# Altium PCB PCB2.PcbDoc
Units mil, origin at the board's own origin, x right, y up, seen from the top; angles counter-clockwise.
Board outline 6000 x 4000 mil, 2 copper layers (Top Layer, Bottom Layer); 16 components, 9 nets, 51 pads, 0 vias.
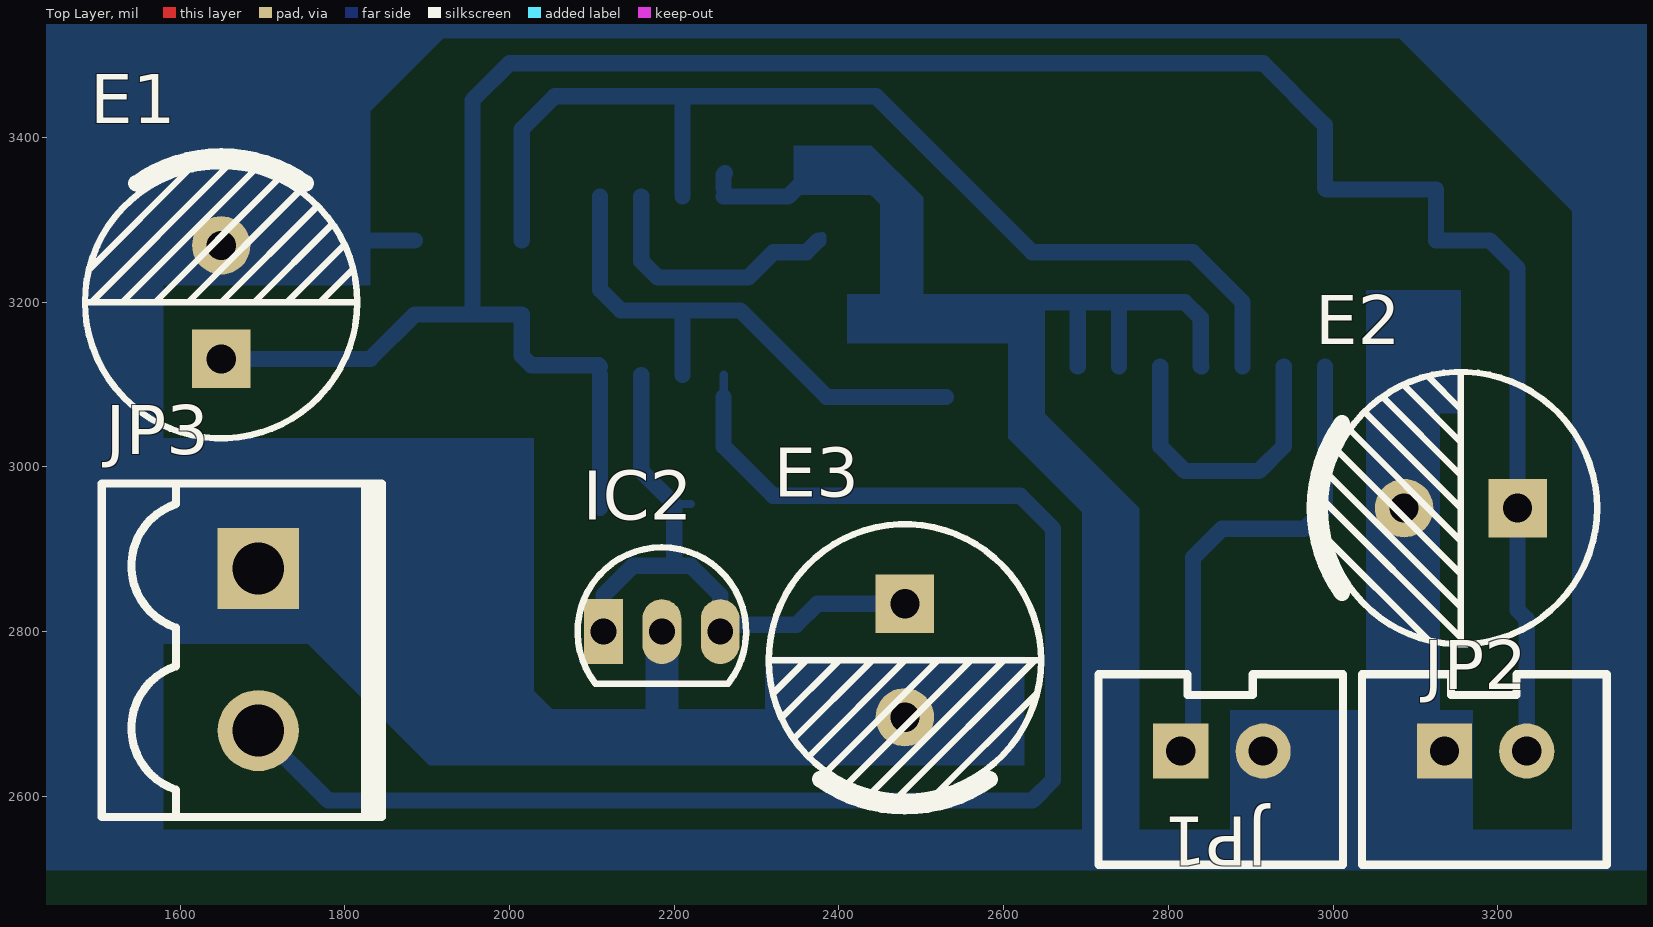
[diagram p0: Top Layer view]
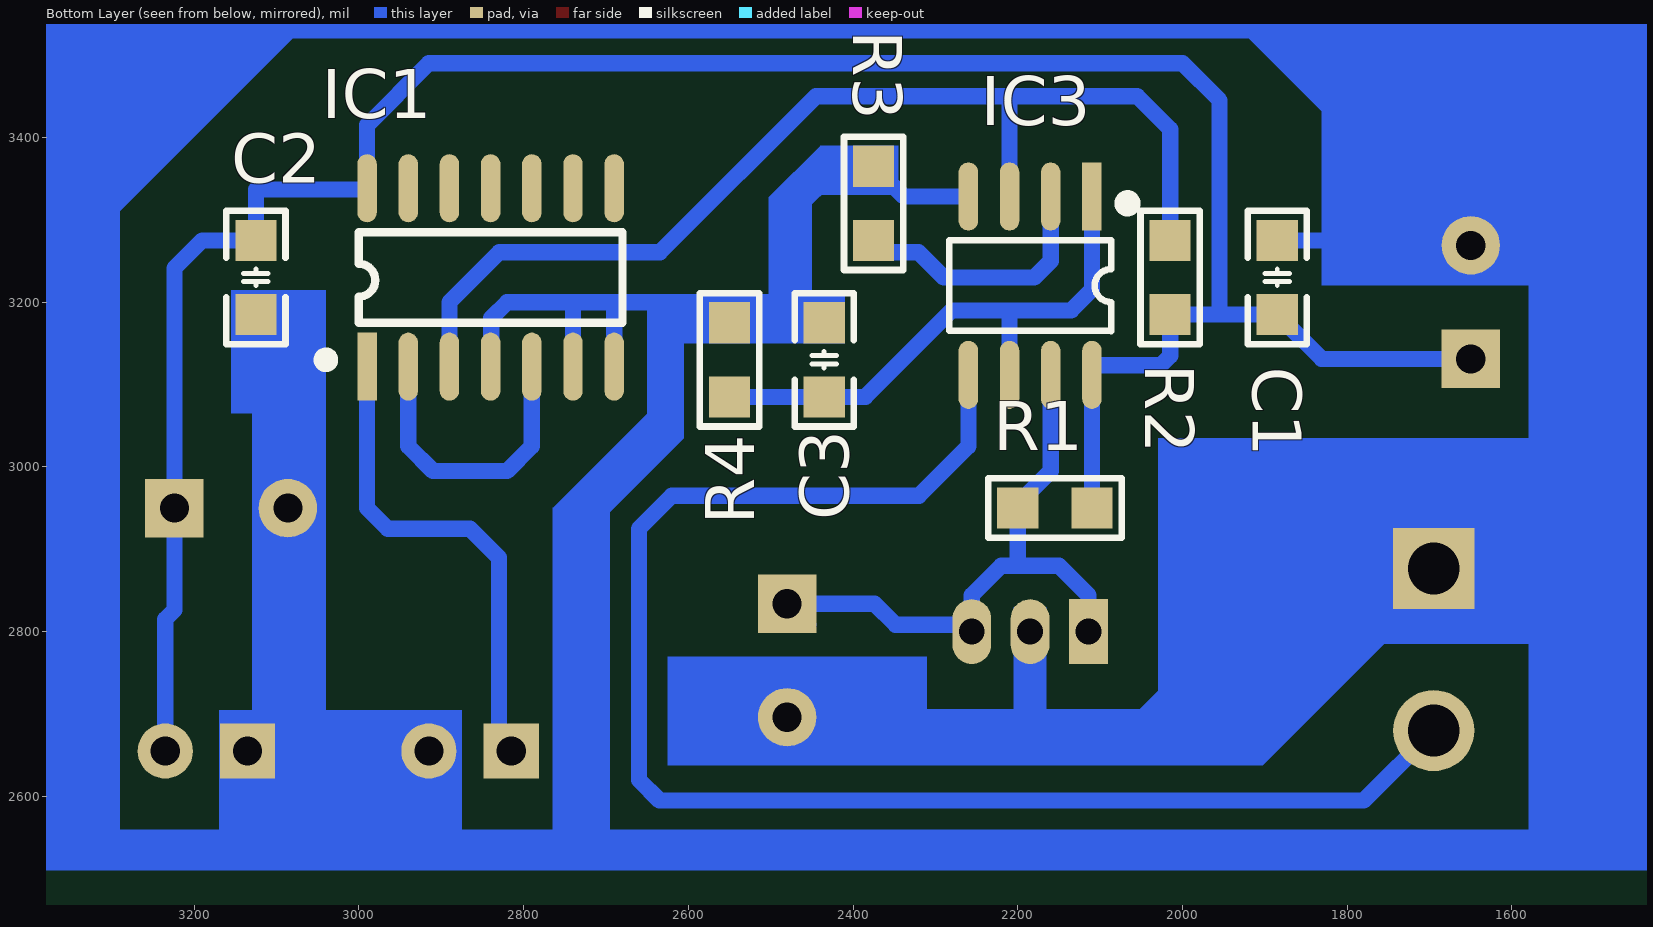
[diagram p1: Bottom Layer view, seen from below]

## Layer stack, top to bottom
Top Solder: solder mask 0.4, Solder Resist, Dk 3.5
Top Layer: signal copper 1.4
Dielectric 1: dielectric 12.6, FR-4, Dk 4.8
Bottom Layer: signal copper 1.4
Bottom Solder: solder mask 0.4, Solder Resist, Dk 3.5

## Board outline
1000,1000 7000,1000 7000,5000 1000,5000

## Design rules (kind name [scope] priority, off if disabled: settings)
Clearance [All] p1: gap=10 ignorepadtopadclearanceinfootprint=FALSE except(0: Arc-Hole Track-Hole SMDPad-Hole THPad-Hole Via-Hole Fill-Hole Poly-Hole Region-Hole Text-Hole)
PolygonConnect [All] p1: connectstyle=Relief reliefconductorwidth=10 reliefentries=4 polygonreliefangle="90 Angle" airgapwidth=10
RoutingVias [All] p1: holewidth=28 width=50 viastyle="Through Hole" minholewidth=28 minwidth=50 maxholewidth=28 maxwidth=50
SolderMaskExpansion [All] p1: expansion=4
Width [All] p1: maxlimit=39.37 minlimit=10 preferedwidth=31.5 toplayer_maxwidth=10 toplayer_prefwidth=10 bottomlayer_minwidth=19.68 minimp=50.000000 maximp=50.000000 favimp=50.000000
30 further rules are at their usual default settings.

## Components (designator, comment, footprint, x,y, rotation, side; value= is the part's Value field where it differs from the comment)
C1 "104" "C 0805_M" 1885,3230 r270 bottom
C2 "104" "C 0805_M" 3125,3230 r90 bottom
C3 "1n" "C 0805_M" 2435,3130 r270 bottom
E1 "220uF" "CAP 3.5*8*11.5" 1650,3200 r90 top
E2 "220uF" "CAP 3.5*8*11.5" 3155,2950 r180 top
E3 "100uF" "CAP 3.5*8*11.5" 2480,2765 r270 top
IC1 "CD4013" SOP14_M 2840,3230 r90 bottom
IC2 "TL431" TO92A 2185,2800 r270 top
IC3 "LM331" SOP8_M 2185,3220 r270 bottom
JP1 "HDR-1X2" XH2.54-LI-2P 2865,2655 r0 top
JP2 "HDR-1X2" XH2.54-LI-2P 3185,2655 r0 top
JP3 "HDR-1X2" KF2EDGK5.0-LI-2P 1695,2778.31 r270 top
R1 "4.7K" "R 0805_M" 2155,2950 r180 bottom
R2 "4.7K" "R 0805_M" 2015,3230 r270 bottom
R3 "4.7K" "R 0805_M" 2375,3320 r270 bottom
R4 "10K" "R 0805_M" 2550,3130 r270 bottom

## Footprints (in the part's own frame and the unit in brackets; to place one, negate y for a bottom-side part, rotate by r counter-clockwise, add the part's x,y. Pads: shape width x height; smd on the part's side, far side on the other; paste and mask are expansions set on the pad)
"C 0805_M" [mil] "无极性贴片电容"
  rect 50x50 smd: 1(-45,0) 2(45,0)
  silkscreen extent -81,-36 81,36, body extent -39,-24 39,24, height 20
"CAP 3.5*8*11.5" [mm] "脚距3.5mm直径8mm高度11.5mm"
  rect 1.8x1.8 hole 0.9: 1(-1.75,0)
  round 1.8 hole 0.9: 2(1.75,0)
  silkscreen extent -4.2,-4.2 4.5,4.2, body extent -4,-4 4.01,4, height 11.53
KF2EDGK5.0-LI-2P [mm] "立插端子"
  rect 2.5x2.5 hole 1.6: 1(-2.5,0)
  round 2.5 hole 1.6: 2(2.5,0)
  silkscreen extent -5.12,-4.83 5.17,3.81, body extent -5.04,-4.75 5.04,3.75, height 11.25
"R 0805_M" [mil] "1/8W贴片电阻"
  rect 50x50 smd: 1(-45,0) 2(45,0)
  silkscreen extent -81,-36 81,36, body extent -39,-25 39,25, height 20
SOP8_M [mm] "5*6*1.8mm（长宽高）"
  rect 2.1x0.6 smd: 1(-2.75,1.905)
  oval 2.1x0.6 smd: 2(-2.75,0.635) 3(-2.75,-0.635) 4(-2.75,-1.905) 5(2.75,-1.905) 6(2.75,-0.635) 7(2.75,0.635) 8(2.75,1.905)
  silkscreen extent -2.69,-2.5 1.4,3.15, body extent -3,-2.5 3,2.5, height 1.9
SOP14_M [mm] "8.7*6.2*1.8mm（长宽高）"
  rect 2.1x0.6 smd: 1(-2.75,3.81)
  oval 2.1x0.6 smd: 2(-2.75,2.54) 3(-2.75,1.27) 4(-2.75,0) 5(-2.75,-1.27) 6(-2.75,-2.54) 7(-2.75,-3.81) 8(2.75,-3.81) 9(2.75,-2.54) 10(2.75,-1.27) 11(2.75,0) 12(2.75,1.27) 13(2.75,2.54) 14(2.75,3.81)
  silkscreen extent -2.67,-4.06 1.4,5.21, body extent -3,-4.35 3,4.35, height 1.9
TO92A [mm] "92晶体管"
  rect 2x1.2 hole 0.8: 1(0,-1.8)
  oval 2x1.2 hole 0.8: 2(0,0) 3(0,1.8)
  silkscreen extent -2.6,-2.6 1.6,2.6, body extent -2.3,-2.3 1.3,2.3, height 7.6
XH2.54-LI-2P [mm] "接插件，2P"
  rect 1.7x1.7 hole 0.9: 1(-1.27,0)
  round 1.7 hole 0.9: 2(1.27,0)
  silkscreen extent -3.81,-3.51 3.74,2.37, body extent -3.77,-3.3 3.77,2.4, height 7.05

## Part data
C1 C2 C3: library part C, "无极性贴片电容"
E1 E2 E3: library part C-CAP, "直插电解电容"
IC2: library part TL431-ID, "可调基准稳压芯片", BOM名称=¿Éµ÷»ù×, 学习资源=www.ooocke.
IC3: "频率电压转换器"
JP1 JP2 JP3: library part "Header 2", "2P接插件", BOM名称=2P接, 学习资源=www.ooocke.
R1 R2 R3 R4: library part R, "贴片电阻"

## Nets (pads, with @x,y where several pads share a name; then routed paths per layer and width w, separated by ;. In a path a pad name is that pad's centre, name@x,y a point inside that pad or via, vN(x,y) a via of type N, cw(c..) or ccw(c..) an arc to the next point about the centre after c; other vN are vias at no path point)
cin: E3.1 IC2.1 IC2.3 IC3.7 R1.1 | length 802.4
  Bottom Layer w10: R1.1@2200,2955 R1.1@2220,2955
  Bottom Layer w19.68: IC2.1 2114.13,2844.13 2150,2880 2200,2880 ; IC3.7 2160,2995 2200,2955 R1.1 2200,2880 ; E3.1@2454.41,2808.31 E3.1 2373.9,2833.9 2348.31,2808.31 2264.17,2808.31 IC2.3 2255.87,2844.13 2220,2880 2200,2880
F_O: IC1.3 IC3.3 R2.1 | length 1330.1
  Bottom Layer w19.68: R2.1 2015,3410 2055,3450 2210,3450 ; IC3.3 2210,3450 ; IC1.3 2890,3200 2829.53,3260.47 2634.53,3260.47 2445,3450 2210,3450
GND: C1.1 C2.1 C3.1 E1.2 E2.2 E3.2 IC1.4 IC1.6 IC1.7 IC2.2 IC3.4 JP1.2 JP2.1 JP3.1 R3.1 R4.1 | length 3867.5
  Bottom Layer w10: IC3.4 IC3.4@2260,3338.71 ; R3.1@2370.74,3360.74 R3.1 ; 2839.25,3180.75 2840,3180 IC1.4
  Bottom Layer w19.68: 1540,3275 C1.1 ; JP3.1 1867.4,2876.73 2048.03,2696.1 2185,2696.1 ; IC2.2 2185,2696.1 ; IC3.4 2338.27,3328.27 R3.1@2370.74,3360.74 ; IC3.4@2260,3338.71 2260,3354.66 IC3.4@2261.82,3356.48 ; R3.1 2386.53,3353.47 2436.53,3353.47 2490,3300 2490,3190.16 ; C3.1 2450.16,3190.16 2490,3190.16 ; E3.2 2185,2696.1 ; IC1.7 2690,3200 ; 2725,2530 2725,2970 2625.16,3069.84 2625.16,3190.16 ; IC1.6 2740,3200 ; IC1.4 2839.25,3122.49 2839.25,3180.75 2820,3200 2740,3200 ; JP1.2@2930,2655 3110,2655 3086.38,2678.62 3086.38,2949.72 E2.2 3086.1,3061.1 3125,3100 C2.1 ; 2490,3190.16 2534.84,3190.16 R4.1 2565.16,3190.16 2625.16,3190.16 ; 2625.16,3190.16 2635,3200 2690,3200 ; 2690,3200 2740,3200
NetC3_2: C3.2 IC3.1 IC3.6 R4.2 | length 667.5
  Bottom Layer w19.68: IC3.1 2110,3215 2135,3190 2215,3190 ; IC3.6 2210,3185 2215,3190 ; R4.2@2530,3085 C3.2 2385,3085 2280,3190 2215,3190
NetIC1_1: IC1.1 JP1.1 | length 596.9
  Bottom Layer w19.68: JP1.1@2805,2660 2815,2670 2830,2685 2830,2890 2865,2925 2965,2925 2990,2950 IC1.1
NetIC1_2: IC1.2 IC1.5 | length 368.3
  Bottom Layer w19.68: IC1.5 2790,3025 2820,2995 2910,2995 2940,3025 IC1.2
NetIC3_2: IC3.2 R3.2 | length 327.3
  Bottom Layer w10: R3.2 R3.2@2380,3280
  Bottom Layer w19.68: IC3.2 2160,3250 2180,3230 2290,3230 2320.47,3260.47 2360.47,3260.47 R3.2
Ser_IN: IC3.5 JP3.2 | length 1843.7
  Bottom Layer w10: IC3.5@2260,3085 IC3.5
  Bottom Layer w19.68: JP3.2 1779.88,2595 2635,2595 2660,2620 2660,2925 2620,2965 2320,2965 2260,3025 IC3.5@2260,3085
VCC: C1.2 C2.2 E1.1 E2.1 IC1.14 IC3.8 JP2.2 R1.2 R2.2 | length 3031.9
  Bottom Layer w10: IC3.8 IC3.8@2110,3121.65
  Bottom Layer w19.68: E1.1 1831.1,3131.1 C1.2 1955,3185 ; R1.2 IC3.8 ; IC3.8@2110,3121.65 2108.18,3123.47 2026.53,3123.47 2015,3135 R2.2 1955,3185 ; JP2.2 3235,2815 3223.9,2826.1 E2.1 3223.9,3241.1 3190,3275 C2.2 3125,3336.69 2991.58,3336.69 IC1.14 2990,3415 2915,3490 2000,3490 1955,3445 1955,3185
pads on no net: IC1.8 IC1.9 IC1.10 IC1.11 IC1.12 IC1.13

## Polygon pours and split planes (outlines as drawn)
no net on Bottom Layer "Bottom Layer-No Net" (solid, pour order 6): 2485,3815
no net on Bottom Layer "Bottom Layer-No Net 1" (solid, pour order 4): 2420,3770
no net on Bottom Layer "Bottom Layer-No Net 2" (solid, pour order 2): 1430,3605
no net on Bottom Layer "Bottom Layer-No Net 3" (solid, pour order 0): 1430,3605

## Other copper
Bottom Layer:
  rectangle net GND: 3040,2605 3130,3090
  rectangle net GND: 2875,2530 3170,2705
  rectangle net GND: 2345,3330 2440,3390
  region net GND: 2502.5,3327.5 2440,3390 2409.22,3359.22 2471.72,3296.72
  rectangle net GND: 2450,3185 2502.5,3327.5
  rectangle net GND: 2410,3150 2555,3210
  rectangle net GND: 2525,3150 2620,3210
  rectangle net GND: 2695,2930 2710,2975
  region net GND: 2727.5,2912.5 2765,2950 2642.5,3072.5 2605,3035
  rectangle net GND: 2605,3035 2650,3210
  rectangle net GND: 2695,2515.55 2765,2950.55
  region net GND: 3362.5,3462.5 3230.15,3594.85 3165.65,3530.36 3298,3398
  region net GND: 3368.35,3361.65 3135,3595 3070,3530 3303.35,3296.65
  rectangle net GND: 3290,2510 3440,3605
  rectangle net GND: 3040,3065 3155,3215
  rectangle net GND: 1560,2510 3440,2560
  rectangle net GND: 2310,2637.5 2625,2770
  rectangle net GND: 1902.5,2637.5 1990,2690
  region net GND: 1975,2710 1809.61,2875.39 1737.11,2802.89 1902.5,2637.5
  rectangle net GND: 2165,2685 2205,2830
  rectangle net GND: 1965,2637.5 2490,2705
  rectangle net GND: 1875,2675 2030,3035
  rectangle net GND: 1515,2785 1900,3035
  region net GND: 1805.15,3405.15 1930,3530 1877.5,3582.5 1752.65,3457.65
  rectangle net GND: 1535,3220 1831.1,3575
  rectangle net GND: 1525,3520 3405,3605
  rectangle net GND: 1430,2510 1580,3605
  region: 1885,2696.1

## Silkscreen, mask and mechanical layers (free items; w line width, h text height)
Mechanical 1:
  lines w19.68: 1430,2510 3440,2510 3440,3605 1430,3605 1430,3555 1430,2510